# Allegro board LED2.brd
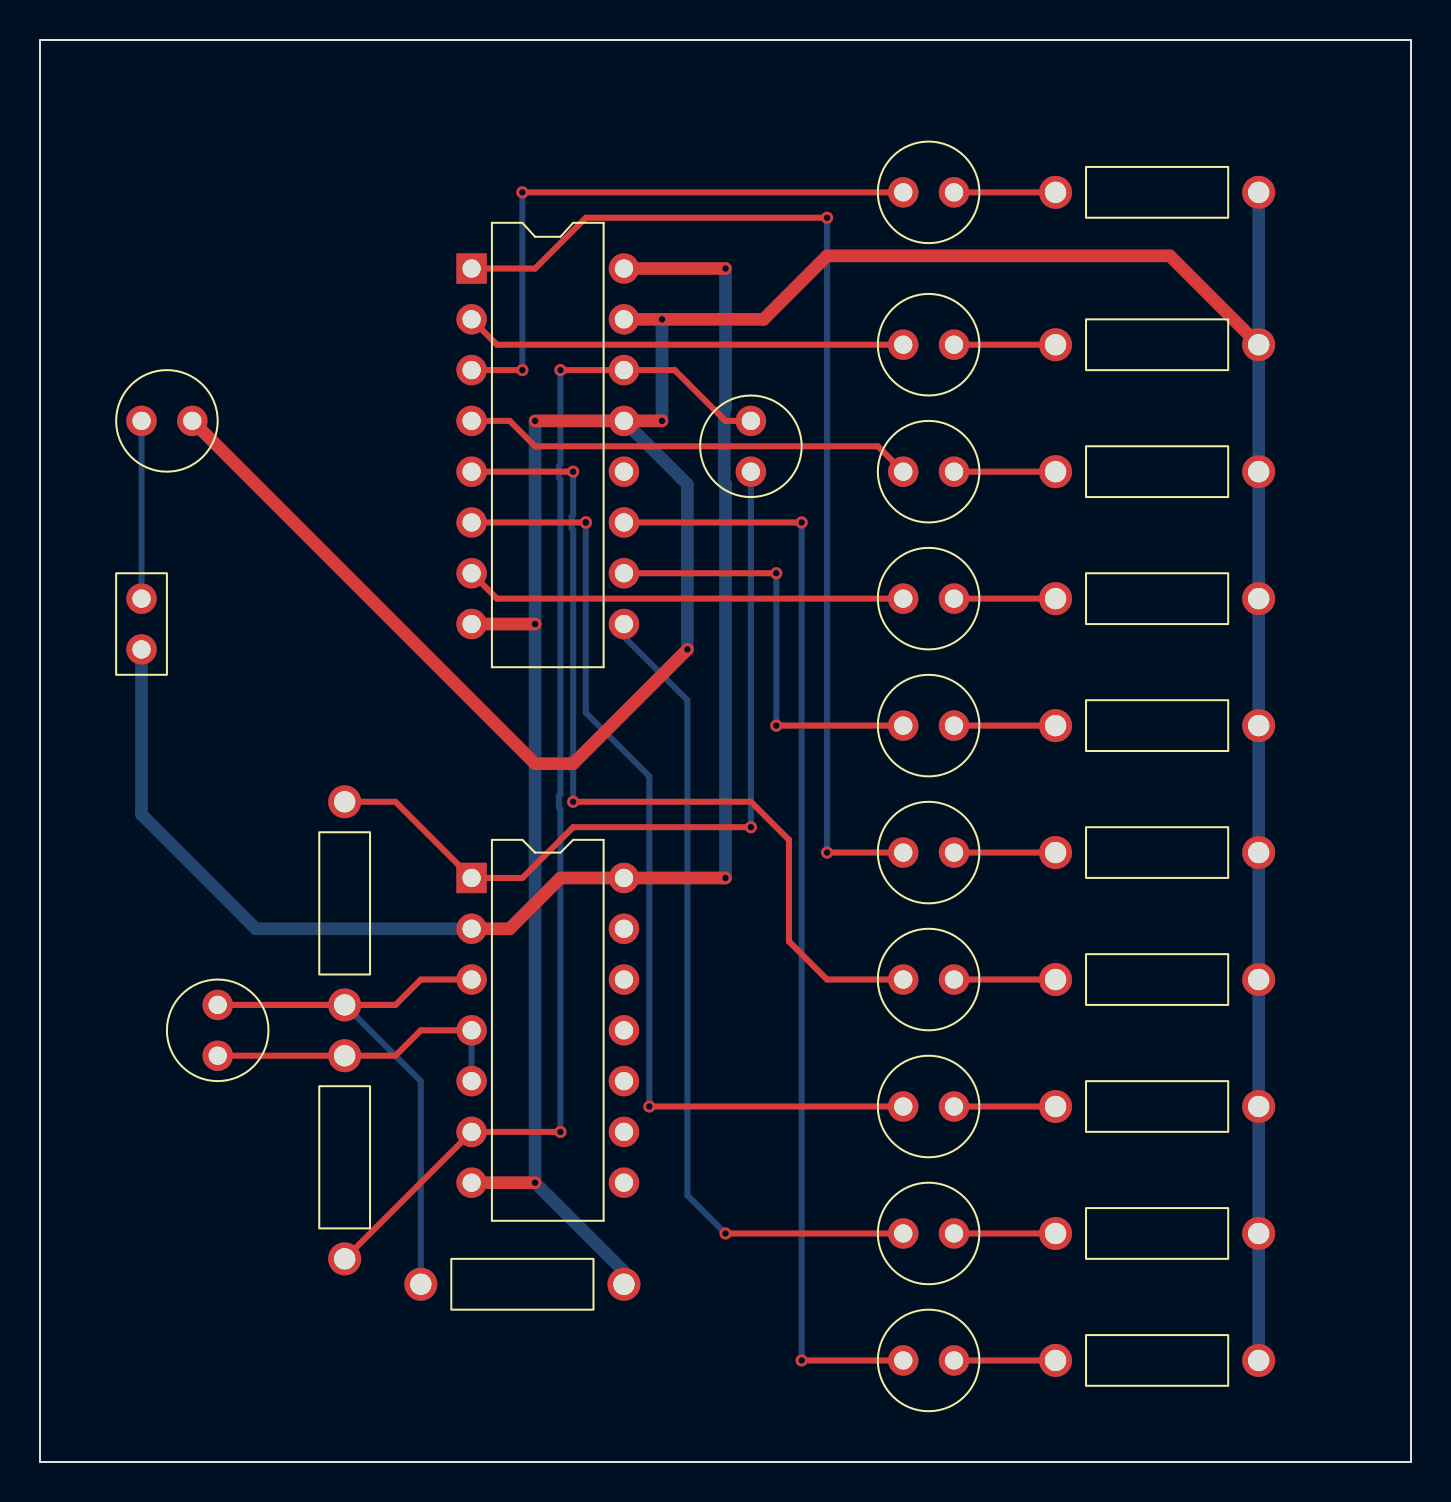
[diagram p0: board, top side]
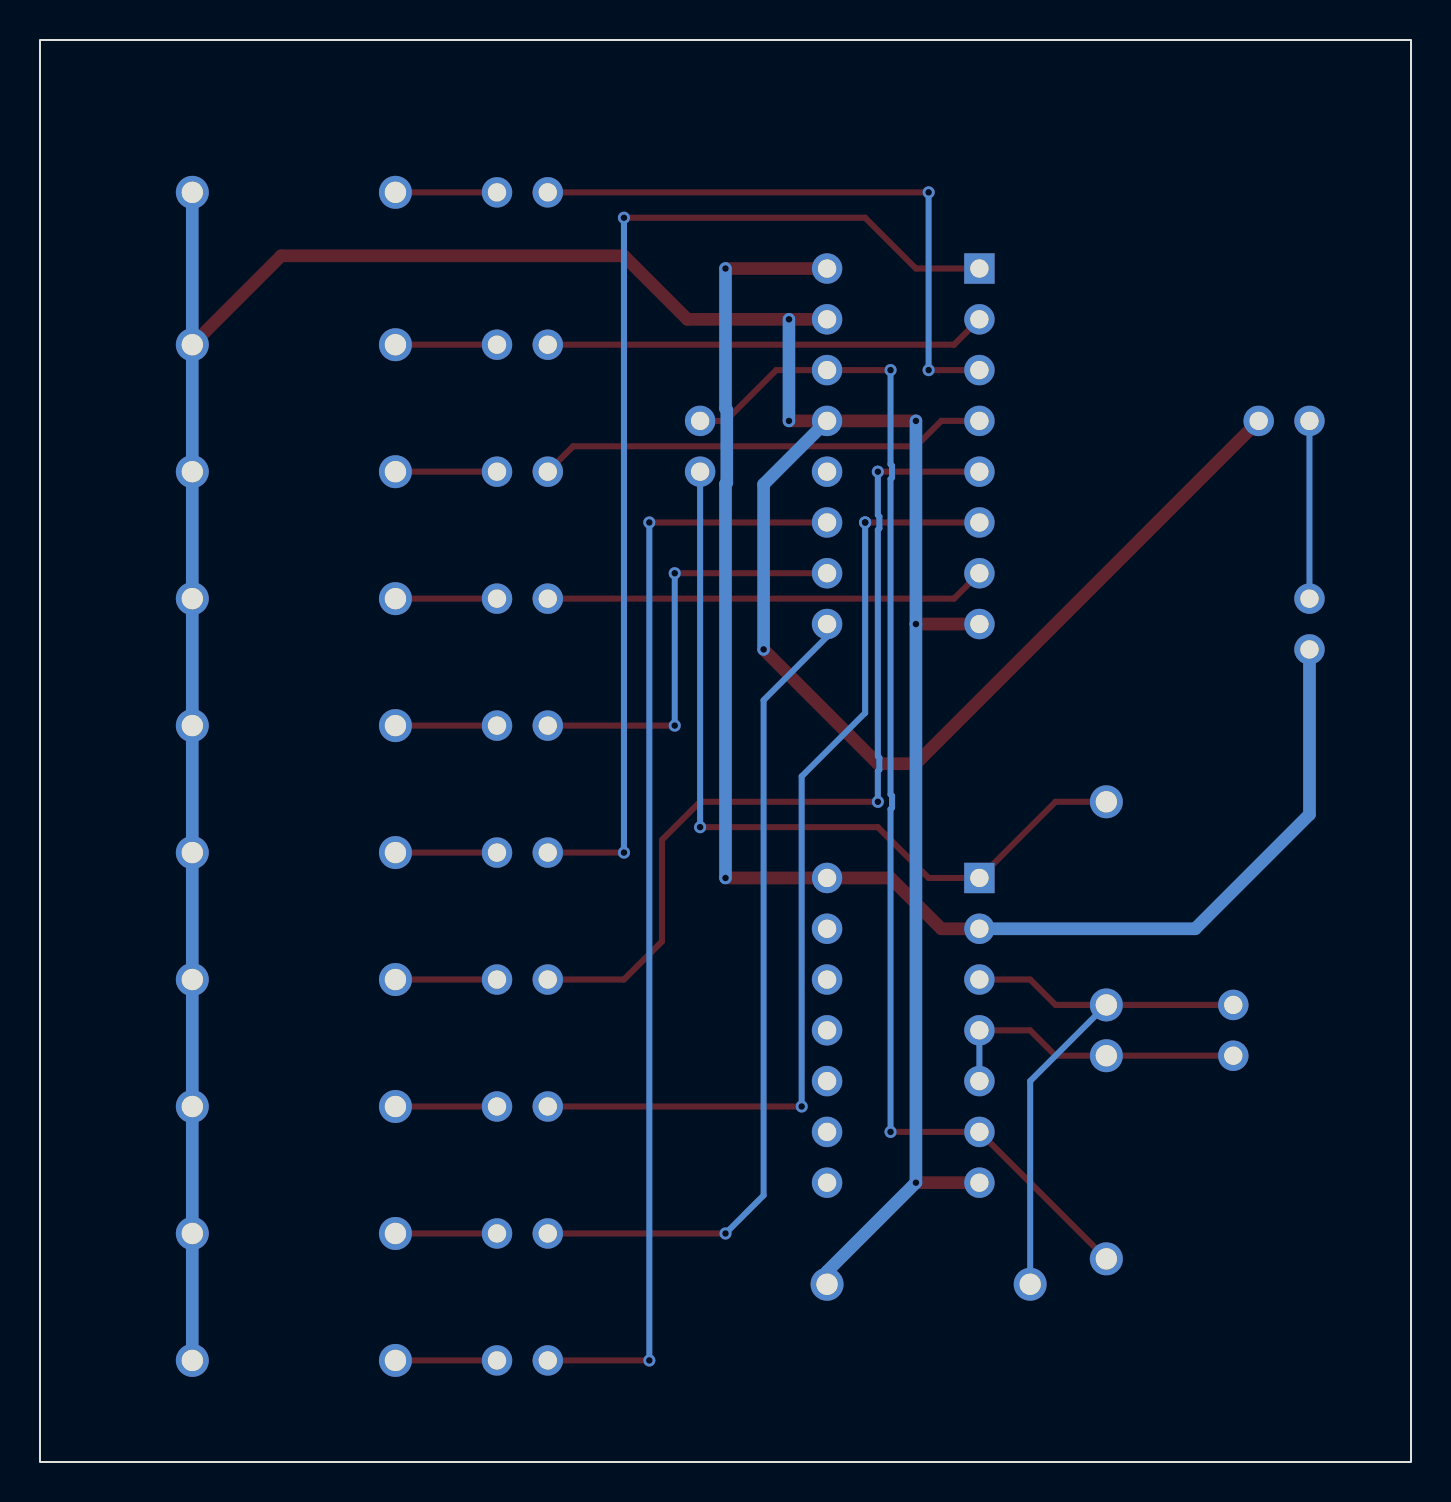
[diagram p1: board, bottom side, seen from below]

Outline 68.58 x 71.12 mm; copper layers: TOP, BOTTOM. Coordinates in mm from the lower left corner of the outline.
Outline path: rectangle 0,0 68.58,71.12

## Design rules (mm)
nets with their own width: min track width 0.635; nets GND VCC

## Placement (name value [footprint] x y rotation side)
BT1  BATTERY  [JUMPER2]  5.08 40.64 90 top
C1  470uF  [CAP196]  8.89 22.86 180 top
C2  470uF  [CAP196]  35.56 52.07 180 top
C3  470uF  [CAP196]  5.08 52.07 270 top
D1  LED  [CAP196]  43.18 63.5 270 top
D2  LED  [CAP196]  43.18 55.88 270 top
D3  LED  [CAP196]  43.18 49.53 270 top
D4  LED  [CAP196]  43.18 43.18 270 top
D5  LED  [CAP196]  43.18 36.83 270 top
D6  LED  [CAP196]  43.18 30.48 270 top
D7  LED  [CAP196]  43.18 24.13 270 top
D8  LED  [CAP196]  43.18 17.78 270 top
D9  LED  [CAP196]  43.18 11.43 270 top
D10  LED  [CAP196]  43.18 5.08 270 top
R1  1k  [RES400]  15.24 22.86 0 top
R2  1k  [RES400]  15.24 20.32 180 top
R3  330  [RES400]  60.96 63.5 90 top
R4  330  [RES400]  60.96 55.88 90 top
R5  330  [RES400]  60.96 49.53 90 top
R6  330  [RES400]  60.96 43.18 90 top
R7  330  [RES400]  60.96 36.83 90 top
R8  330  [RES400]  60.96 30.48 90 top
R9  330  [RES400]  60.96 24.13 90 top
R10  330  [RES400]  60.96 17.78 90 top
R11  330  [RES400]  60.96 11.43 90 top
R12  330  [RES400]  60.96 5.08 90 top
R13  1k  [RES400]  29.21 8.89 90 top
U1  74LS00  [DIP14_3]  21.59 29.21 0 top
U2  CD4017B  [DIP16_3]  21.59 59.69 0 top

## Library data of the parts
BT1 = BATTERY: User Part Number: ***
C1-C3 = CAP: Tolerance: ***; User Part Number: ***
D1-D10 = LED: Tolerance: ***; User Part Number: ***
R1-R13 = R: Tolerance: ***; User Part Number: ***
U1 = 74LS00: Tolerance: ***; User Part Number: ***
U2 = CD4017B: Tolerance: ***; User Part Number: ***

## Footprints (pads in the part's own frame, mm; a bottom-side part is the same pattern mirrored in y, then rotated)
CAP196
  round 1.524 hole 0.914: 1(0,0) 2(0,2.54)
DIP14_3
  rect 1.524x1.524 hole 0.914: 1(0,0)
  round 1.524 hole 0.914: 2(0,-2.54) 3(0,-5.08) 4(0,-7.62) 5(0,-10.16) 6(0,-12.7) 7(0,-15.24) 8(7.62,-15.24) 9(7.62,-12.7) 10(7.62,-10.16) 11(7.62,-7.62) 12(7.62,-5.08) 13(7.62,-2.54) 14(7.62,0)
DIP16_3
  rect 1.524x1.524 hole 0.914: 1(0,0)
  round 1.524 hole 0.914: 2(0,-2.54) 3(0,-5.08) 4(0,-7.62) 5(0,-10.16) 6(0,-12.7) 7(0,-15.24) 8(0,-17.78) 9(7.62,-17.78) 10(7.62,-15.24) 11(7.62,-12.7) 12(7.62,-10.16) 13(7.62,-7.62) 14(7.62,-5.08) 15(7.62,-2.54) 16(7.62,0)
JUMPER2
  round 1.524 hole 0.914: 1(0,0) 2(2.54,0)
RES400
  round 1.651 hole 1.067: 1(0,0) 2(0,10.16)

## Nets
GND: C3.2 R3.1 R4.1 R5.1 R6.1 R7.1 R8.1 R9.1 R10.1 R11.1 R12.1 R13.1 U1.7 U2.8 U2.13(C\K\E\) U2.15(RST)
VCC: BT1.1(+) U1.2(B) U1.14 U2.16(VDD)
N00817: C2.2 R1.2 U1.1(A)
N00832: C2.1 R2.2 U1.6(Y) U2.14(CLK)
N01324: D1.1(ANODE) U2.3(Q0)
N01364: D2.1(ANODE) U2.2(Q1)
N01448: D3.1(ANODE) U2.4(Q2)
N01540: D4.1(ANODE) U2.7(Q3)
N01640: D5.1(ANODE) U2.10(Q4)
N01748: D6.1(ANODE) U2.1(Q5)
N01807: D7.1(ANODE) U2.5(Q6)
N01929: D8.1(ANODE) U2.6(Q7)
N02059: D9.1(ANODE) U2.9(Q8)
N02197: D10.1(ANODE) U2.11(Q9)
N12221: C1.1 R1.1 R13.2 U1.3(Y)
N14797: C1.2 R2.1 U1.4(A) U1.5(B)
N16175: D1.2(CATHODE) R3.2
N16274: D2.2(CATHODE) R4.2
N16375: D3.2(CATHODE) R5.2
N16478: D4.2(CATHODE) R6.2
N16583: D5.2(CATHODE) R7.2
N16690: D6.2(CATHODE) R8.2
N16799: D7.2(CATHODE) R9.2
N16910: D8.2(CATHODE) R10.2
N17023: D9.2(CATHODE) R11.2
N17138: D10.2(CATHODE) R12.2
N22254: BT1.2(-) C3.1

Pads without a net: U1 8 9 10 11 12 13; U2 12

## Via types
v1: diameter 0.61, hole 0.33, TOP to BOTTOM, 35 vias

## Routing (per net, layer and track width the routed paths; a pad name or vN(x,y) marks a point on that pad's centre or on a via; arc(x,y) is an arc through that point)
GND: length 203.1
  TOP w0.635: U1.7 v1(24.77,13.97) ; v1(7.62,52.07) 24.77,34.92 26.67,34.92 v1(32.38,40.64) ; R4.1 56.52,60.33 39.37,60.33 36.2,57.15 v1(31.11,57.15) U2.15 ; v1(31.11,52.07) U2.13 v1(24.77,52.07) ; v1(24.77,41.91) v1(21.59,41.91)
  BOTTOM w0.635: v1(31.11,57.15) v1(31.11,52.07) ; R13.1 29.21,9.53 v1(24.77,13.97) v1(24.77,41.91) v1(24.77,52.07) ; U2.13 32.38,48.9 v1(32.38,40.64) ; v1(60.96,63.5) R4.1 v1(60.96,49.53) R6.1 R7.1 R8.1 R9.1 R10.1 R11.1 R12.1
VCC: length 76.5
  TOP w0.635: v1(29.21,59.69) v1(34.29,59.69) ; U1.2 23.5,26.67 26.04,29.21 U1.14 v1(34.29,29.21)
  BOTTOM w0.635: BT1.1 5.08,32.38 10.79,26.67 U1.2 ; v1(34.29,59.69) 34.29,52.69 34.23,52.62 34.23,48.98 34.29,48.91 v1(34.29,29.21)
N00817: length 40.7
  TOP w0.305: v1(35.56,31.75) 26.67,31.75 24.13,29.21 v1(21.59,29.21) 17.78,33.02 v1(15.24,33.02)
  BOTTOM w0.305: v1(35.56,31.75) C2.2
N00832: length 62.2
  TOP w0.305: C2.1 34.29,52.07 31.75,54.61 U2.14 v1(26.04,54.61) ; v1(26.04,16.51) U1.6 R2.2
  BOTTOM w0.305: v1(26.04,16.51) 26.04,32.65 25.96,32.73 25.96,33.31 26.04,33.39 26.04,49.16 25.96,49.24 25.96,49.82 26.04,49.9 v1(26.04,54.61)
N01324: length 30.5
  TOP w0.305: D1.1 v1(24.13,63.5) ; v1(24.13,54.61) U2.3
  BOTTOM w0.305: v1(24.13,63.5) v1(24.13,54.61)
N01364: length 22.1
  TOP w0.305: U2.2 22.86,55.88 D2.1
N01448: length 22.6
  TOP w0.305: U2.4 23.5,52.07 24.77,50.8 41.91,50.8 D3.1
N01540: length 22.1
  TOP w0.305: D4.1 22.86,43.18 U2.7
N01640: length 21.6
  TOP w0.305: v1(36.83,36.83) D5.1 ; U2.10 v1(36.83,44.45)
  BOTTOM w0.305: v1(36.83,44.45) v1(36.83,36.83)
N01748: length 54.4
  TOP w0.305: v1(21.59,59.69) 24.77,59.69 27.3,62.23 v1(39.37,62.23) ; v1(39.37,30.48) D6.1
  BOTTOM w0.305: v1(39.37,62.23) v1(39.37,30.48)
N01807: length 44.9
  TOP w0.305: U2.5 v1(26.67,49.53) ; v1(26.67,33.02) 35.56,33.02 37.47,31.11 37.47,26.04 39.37,24.13 D7.1
  BOTTOM w0.305: v1(26.67,33.02) 26.67,34.55 26.59,34.63 26.59,35.22 26.67,35.3 26.67,46.62 26.59,46.7 26.59,47.28 26.67,47.36 v1(26.67,49.53)
N01929: length 48.9
  TOP w0.305: U2.6 v1(27.3,46.99) ; v1(30.48,17.78) D8.1
  BOTTOM w0.305: v1(30.48,17.78) 30.48,34.29 27.3,37.47 v1(27.3,46.99)
N02059: length 41.5
  TOP w0.305: v1(34.29,11.43) D9.1
  BOTTOM w0.305: v1(34.29,11.43) 32.38,13.34 32.38,38.1 29.21,41.27 v1(29.21,41.91)
N02197: length 55.9
  TOP w0.305: v1(38.1,5.08) D10.1 ; U2.11 v1(38.1,46.99)
  BOTTOM w0.305: v1(38.1,46.99) v1(38.1,5.08)
N12221: length 28.8
  TOP w0.305: U1.3 19.05,24.13 17.78,22.86 R1.1 C1.1
  BOTTOM w0.305: R13.2 19.05,19.05 R1.1
N14797: length 15.8
  TOP w0.305: C1.2 R2.1 17.78,20.32 19.05,21.59 U1.4
  BOTTOM w0.305: U1.4 U1.5
N16175: length 5.1
  TOP w0.305: D1.2 R3.2
N16274: length 5.1
  TOP w0.305: D2.2 R4.2
N16375: length 5.1
  TOP w0.305: D3.2 R5.2
N16478: length 5.1
  TOP w0.305: D4.2 R6.2
N16583: length 5.1
  TOP w0.305: D5.2 R7.2
N16690: length 5.1
  TOP w0.305: D6.2 R8.2
N16799: length 5.1
  TOP w0.305: D7.2 R9.2
N16910: length 5.1
  TOP w0.305: D8.2 R10.2
N17023: length 5.1
  TOP w0.305: D9.2 R11.2
N17138: length 5.1
  TOP w0.305: D10.2 R12.2
N22254: length 8.9
  BOTTOM w0.305: v1(5.08,52.07) BT1.2

## Text on the board
PAGE_OUTLINE: LED_COUNT | JangTaehee
